# Altium PCB UL-SWAP-DAQ-1.PcbDoc (part 2 of 2)
Units mil, origin at the board's own origin, x right, y up, seen from the top; angles counter-clockwise.
Board outline 4000 x 4000 mil, 2 copper layers (Top Layer, Bottom Layer); 116 components, 150 nets, 387 pads, 16 vias.
Unrouted connection lines stored in the file: 128.
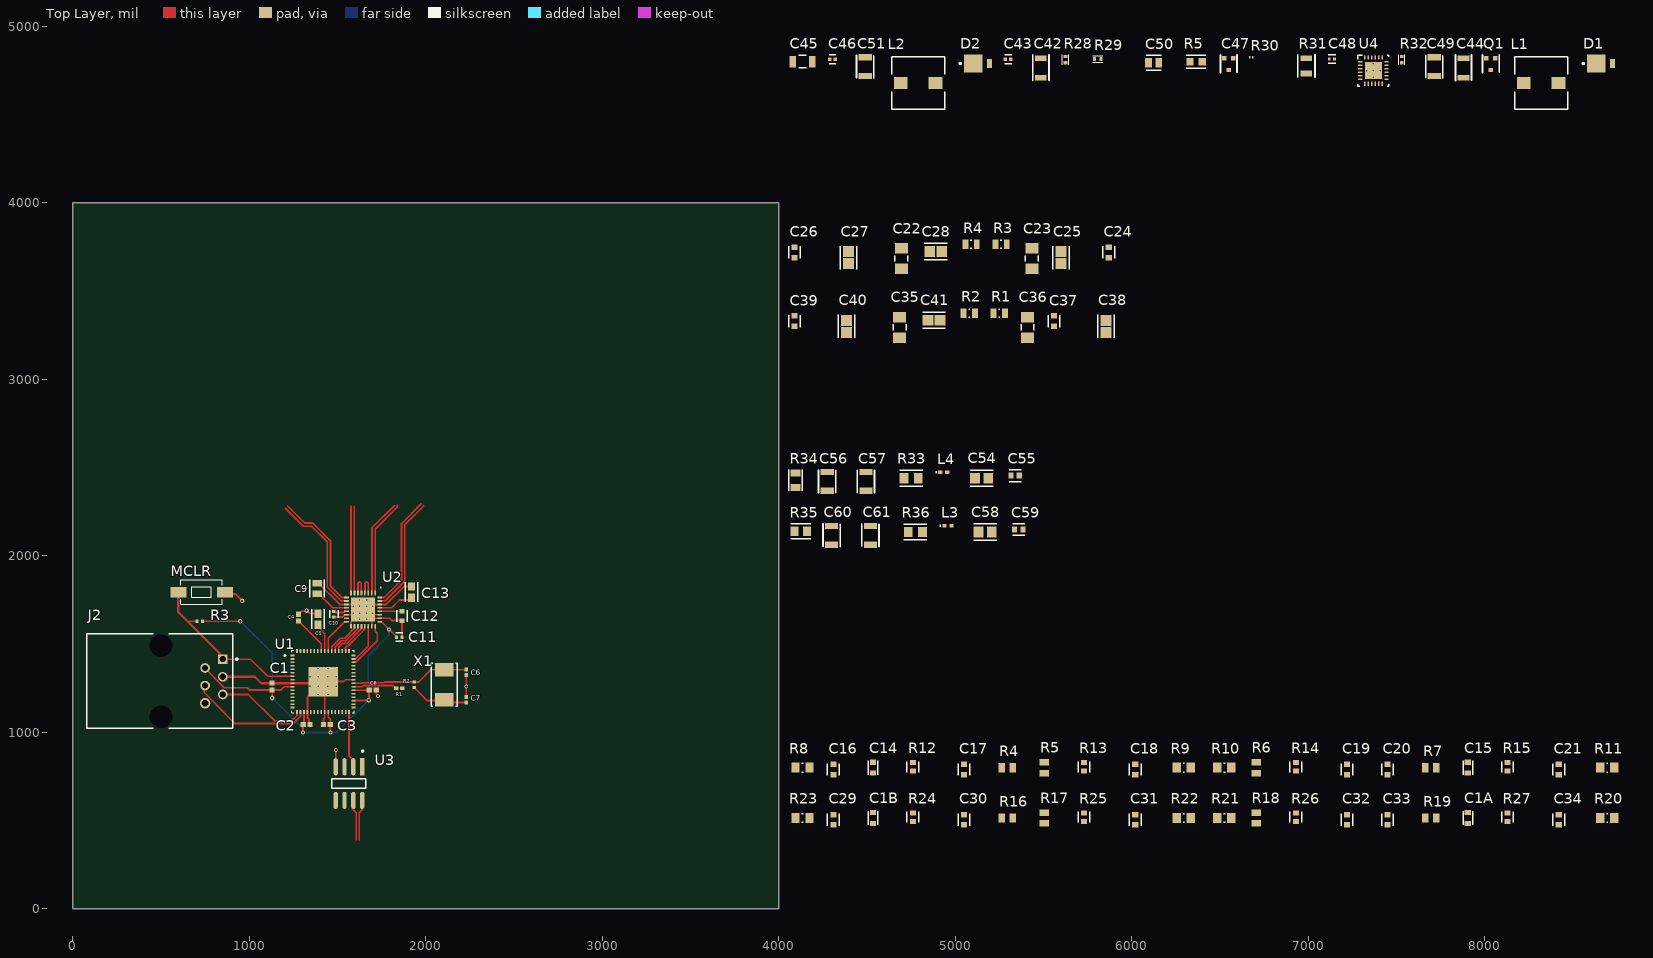
[diagram p0: Top Layer view]

## Via types
v1: diameter 22, hole 12, Top Layer to Bottom Layer, 6 vias
v2: diameter 26, hole 12, Top Layer to Bottom Layer, 5 vias
v3: diameter 19.68, hole 7.87, Top Layer to Bottom Layer, 5 vias

## Nets (pads, with @x,y where several pads share a name; then routed paths per layer and width w, separated by ;. In a path a pad name is that pad's centre, name@x,y a point inside that pad or via, vN(x,y) a via of type N, cw(c..) or ccw(c..) an arc to the next point about the centre after c; other vN are vias at no path point) (continued)
GND: (continued)
  Top Layer w10: C4.1 1280,1670.08 1289.17,1679.25 1289.96,1679.25 1297.65,1686.94 1321.94,1686.94 v2(1325,1690) ; v2@1329.33,1690 1346.19,1673.14 C5.2 ; C2.1 1339.02,1050.28 1339.02,1074.17 1329.65,1083.54 U1.20 1329.65,1199.69 U1.65@1408.39,1278.43 ; C9.2 1392.87,1844.53 1512.09,1725.32 U2.11 1615.98,1725.32 U2.33 ; C3.1 1420.71,1077.66 1428.07,1085.02 U1.25 1428.07,1278.43 U1.65 1535.98,1288.27 1545.83,1298.11 U1.41 ; C10.2 1530.32,1654.25 1542.32,1666.26 U2.14 U2.33@1615.98,1666.26 ; U3.4 v1(1490,900) ; U2.17 1576.61,1626.89 U2.33@1615.98,1666.26 ; U2.23 1694.72,1646.58 U2.33@1675.04,1666.26 ; U2.33@1694.73,1646.57 U2.26 1795.89,1646.57 1809.04,1633.43 C12.1 1865.37,1633.05 1865.37,1540.37 C11.1 ; C8.1 1719.29,1216.4 1730,1205.69 v1(1730,1205) ; U2.27 U2.33@1675.04,1666.26 ; C13.1 1877.52,1826.57 1776.26,1725.32 U2.30 1675.04,1725.32 U2.33 ; C7.2 v1(2230,1260) C6.2 ; U2.33@1615.98,1666.26 U2.33 ; U2.33 U2.33@1675.04,1666.26
  Top Layer w12: J2.3 1032.28,1315 1068.85,1278.43 U1.9 1408.39,1278.43 U1.65 ; MCLR.1@859.65,1785 920,1785 v2(960,1745)
MCLR: J2.1 MCLR.2 R3.1@704.25,1630 U1.7 | length 956.1
  Top Layer w10: 650,1630 R3.1@704.25,1630 ; J2.1 1007.05,1415 1104.25,1317.8 U1.7
  Top Layer w12: MCLR.2 598.11,1681.89 650,1630 J2.1@848.23,1431.77
MUXOUT_ADCIN+: U2.3 U2.4 | length 136.3
  Top Layer w10: U2.4 1655.35,1846.26 1661.03,1851.95 1669.32,1851.95 1675,1846.26 U2.3 U2.3
MUXOUT_ADCIN-: U2.5 U2.6 | length 135.3
  Top Layer w10: U2.6 1615.98,1846.07 1621.35,1851.43 1629.63,1851.43 1635,1846.07 1635,1790.95 U2.5
NetAmpA_1: R18.2 R21.1
NetAmpA_2: C1A.1
NetAmpA_4: R21.2 R26.1
NetAmpA_5: R20.2 R27.1
NetAmpA_8: R19.2 R20.1
NetAmpB_1: R17.2 R22.1
NetAmpB_2: C1B.1
NetAmpB_4: R22.2 R25.1
NetAmpB_5: R23.2 R24.1
NetAmpB_8: R16.2 R23.1
NetAmpC_1: R6.2 R10.1
NetAmpC_2: C15.1
NetAmpC_4: R10.2 R14.1
NetAmpC_5: R11.2 R15.1
NetAmpC_8: R7.2 R11.1
NetAmpD_1: R5.2@5505,830.51 R9.1
NetAmpD_2: C14.1
NetAmpD_4: R9.2 R13.1
NetAmpD_5: R8.2 R12.1
NetAmpD_8: R4.2@5325.51,800 R8.1
NetB2_2: C59.1 L3.1
NetB2_4: R35.2 R36.2
NetB2_6: C59.2
NetC5_1: C5.1 U1.56 | length 164.3
  Top Layer w10: C5.1 1404.92,1595.08 1404.92,1580.08 1428.07,1556.93 U1.56
NetC6_1: C6.1 R2.1@1935,1285.75 U1.40 X1.1 | length 722.5
  Top Layer w10: U1.40 1637.23,1278.43 1639.51,1280.71 1763.33,1280.71 1768.37,1285.75 1935,1285.75 1960.75,1285.75 2029.65,1354.65 X1.1 X1.1@2110.71,1360.35 ; X1.1@2060.71,1355.35 C6.1
NetC7_1: C7.1 R1.2@1866.73,1250 R2.2@1935,1254.25 X1.2 | length 382.4
  Top Layer w10: R2.2@1935,1254.25 2009.25,1180 2099.65,1180 X1.2 X1.2@2115.71,1174.65 ; X1.2@2065.71,1169.65 C7.1
NetC22_1: C22.1 R4.1@5057.52,3765
NetC23_1: C23.1 R3.1@5227.52,3765
NetC35_1: C35.1 R2.1@5047.52,3375
NetC36_1: C36.1 R1.1@5217.52,3375
NetC44_1: L1.1
NetC45_1: C45.1 U4.18
NetC47_2: U4.17
NetC48_2: C48.2 U4.22
NetC50_1: C50.1 U4.16
NetD1_2: D1.2 L1.2 U4.1 U4.24
NetD2_1: D2.1 L2.2 U4.13 U4.14
NetPGA1_4: R1.2@5282.48,3375
NetPGA1_11: R2.2@5112.48,3375
NetPGA2_4: R3.2@5292.48,3765
NetPGA2_11: R4.2@5122.48,3765
NetQ1_2: U4.7
NetR1_1: R1.1@1833.27,1250 U1.39 | length 251.2
  Top Layer w10: U1.39 1638.76,1258.74 1645.72,1265.71 1816.58,1265.71 1832.28,1250 R1.1@1833.27,1250
NetR5_2: R5.2@6399.52,4800 U4.4 U4.8 U4.9 U4.10 U4.11
NetR29_2: 
NetU1_1: U1.1
NetU1_2: U1.2
NetU1_3: U1.3
NetU1_4: U1.4
NetU1_5: U1.5
NetU1_6: U1.6
NetU1_22: U1.22
NetU1_33: U1.33
NetU1_34: U1.34
NetU1_36: U1.36
NetU1_37: U1.37
NetU1_42: U1.42
NetU1_43: U1.43
NetU1_44: U1.44
NetU1_45: U1.45
NetU1_46: U1.46 U2.24 | length 272.2
  Top Layer w10: U1.46 1591.73,1396.81 1603.56,1396.81 1726,1519.25 1726,1560.93 1714.41,1572.52 U2.24
NetU1_53: U1.53 U2.19 | length 201.1
  Top Layer w10: U1.53@1487.4,1468.31 1487.4,1484.6 1521.56,1518.75 1546.97,1518.75 1615.91,1587.69 1615.91,1601.22 U2.19
NetU1_54: U1.54 U2.18 | length 201.1
  Top Layer w10: U1.54@1467.72,1468.31 1467.72,1486.12 1515.34,1533.75 1540.75,1533.75 1596.22,1589.22 1596.22,1601.22 U2.18
NetU1_55: U1.55 U2.16 | length 213.3
  Top Layer w10: U1.55 1447.76,1532.32 1542.32,1626.89 U2.16
NetU1_59: U1.59
NetU1_60: U1.60
NetU1_61: U1.61
NetU1_62: U1.62
NetU1_63: U1.63
NetU1_64: U1.64
PGA_A_Out: R18.1
PGA_B_Out: R17.1
PGA_C_Out: R6.1
PGA_D_Out: R5.1@5505,769.49
PGC: J2.5 U1.17 | length 514.6
  Top Layer w10: J2.5 995,1215 1145,1065 1240,1065 1270.59,1095.59 U1.17
PGD: J2.4 U1.18 | length 701.3
  Top Layer w10: J2.4 745.37,1260.1 745.37,1225.8 810.01,1161.17 810.01,1159.64 919.65,1050 1250,1050 1290.28,1090.28 U1.18
REFBUF: C9.1 U2.12 | length 199.1
  Top Layer w10: C9.1 1392.87,1785.47 1472.72,1705.63 U2.12
REFIN: C10.1 U2.13 | length 75.9
  Top Layer w10: C10.1 1481.97,1685.75 1487.72,1680 1533.07,1680 1534.33,1681.26 1537.64,1681.26 1542.32,1685.94 U2.13
Reserved: J2.6
SCK: U1.50 U2.21 | length 180.5
  Top Layer w10: U1.50 1546.18,1482.89 1552.04,1488.75 1559.39,1488.75 1650.59,1579.95 1650.59,1587.84 U2.21@1655.28,1592.52
"Sensor A (+)": 
"Sensor A (-)": 
"Sensor B (+)": 
"Sensor B (-)": 
"Sensor C (+)": 
"Sensor C (-)": 
"Sensor D (+)": 
"Sensor D (-)": 
Sensor_A_N: 
Sensor_A_P: 
Sensor_B_N: 
Sensor_B_P: 
Sensor_C_N: 
Sensor_C_P: 
Sensor_D_N: 
Sensor_D_P: 
SHDN-A: 
SHDN-B: 
SHDN-C: 
SHDN-D: 
SW: C55.2 L4.1
UART_TX: U1.32 U3.2 | length 319.9
  Top Layer w10: U1.32 1565.87,865.71 1590,841.58 U3.2
VCC+: C26.1 C27.1 C39.1 C40.1
VCC-: C24.1 C25.1 C37.1 C38.1
VDDLBYP: C12.2 U2.28 | length 125.3
  Top Layer w10: U2.28 1748.7,1685.94 1749.33,1686.57 C12.2
Vin: C54.1 C58.1
pads on no net: C42.13 C42.14 C44.13 C44.14 C47.15 C47.16 C47.17 C49.7 C49.8 C51.7 C51.8 C56.7 C56.8 C57.7 C57.8 C60.7 C60.8 C61.7 C61.8 J2.2 J2.MH1 J2.MH2 Q1.15 Q1.16 Q1.17 R28.7 R28.8 R29.7 R29.8 R30.9 R30.10 R31.5 R31.6 R32.7 R32.8 R34.9 R34.10 U1.8 U1.11 U1.12 U1.13 U1.14 U1.15 U1.16 U1.21 U1.23 U1.24 U1.27 U1.28 U1.29 U1.30 U1.31 U1.48 U1.49 U1.51 U1.58 U1.66 U1.67 U1.68 U1.69 U1.70 U1.71 U1.72 U1.73 U1.74 U1.75 U1.76 U1.77 U3.1 U3.3 U3.5 U3.6 U4.12 U4.20 U4.25
copper on no net: | length 16.7
  Top Layer w10: 750.28,1260.47 750.28,1265 ; 750.28,1365 758.91,1373.63
  other v3: 7370,4711.61 7331.61,4750 7370,4750 7408.39,4750 7370,4788.39

## Polygon pours and split planes (outlines as drawn)
GND on Bottom Layer "GND_L02_P001" (solid, pour order 1): 1705,965 1705,795 1400,795 795,795 795,1845 1755,1845 1755,1430 2350,1430 2350,1075 1755,1075 1755,965

## Silkscreen, mask and mechanical layers (free items; w line width, h text height)
Top Overlay:
  text "." at 1735,1815 h60